# Altium PCB ESP8266_Impedance.PcbDoc
Units mil, origin at the board's own origin, x right, y up, seen from the top; angles counter-clockwise.
Board outline 1725 x 1350 mil, 2 copper layers (Top Layer, Bottom Layer); 21 components, 0 nets, 105 pads, 13 vias.
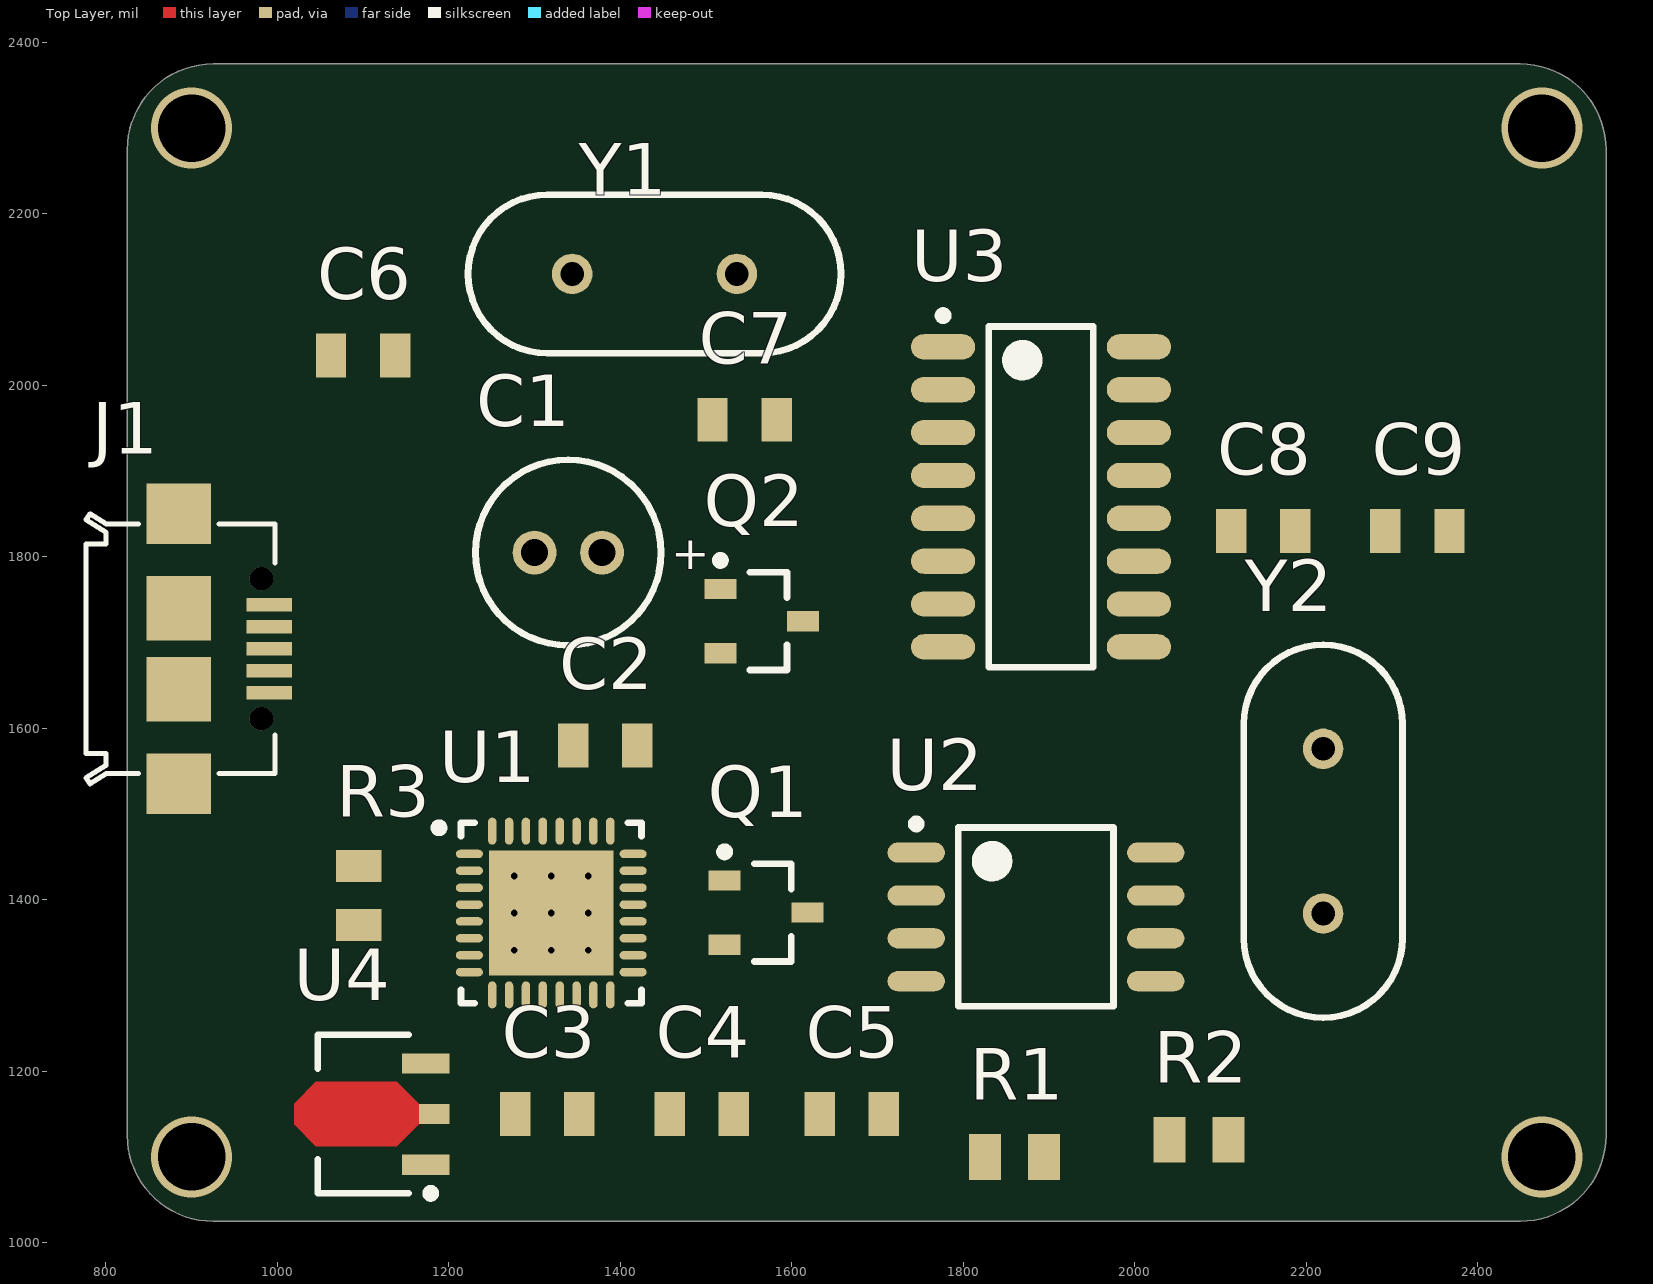
[diagram p0: Top Layer view]
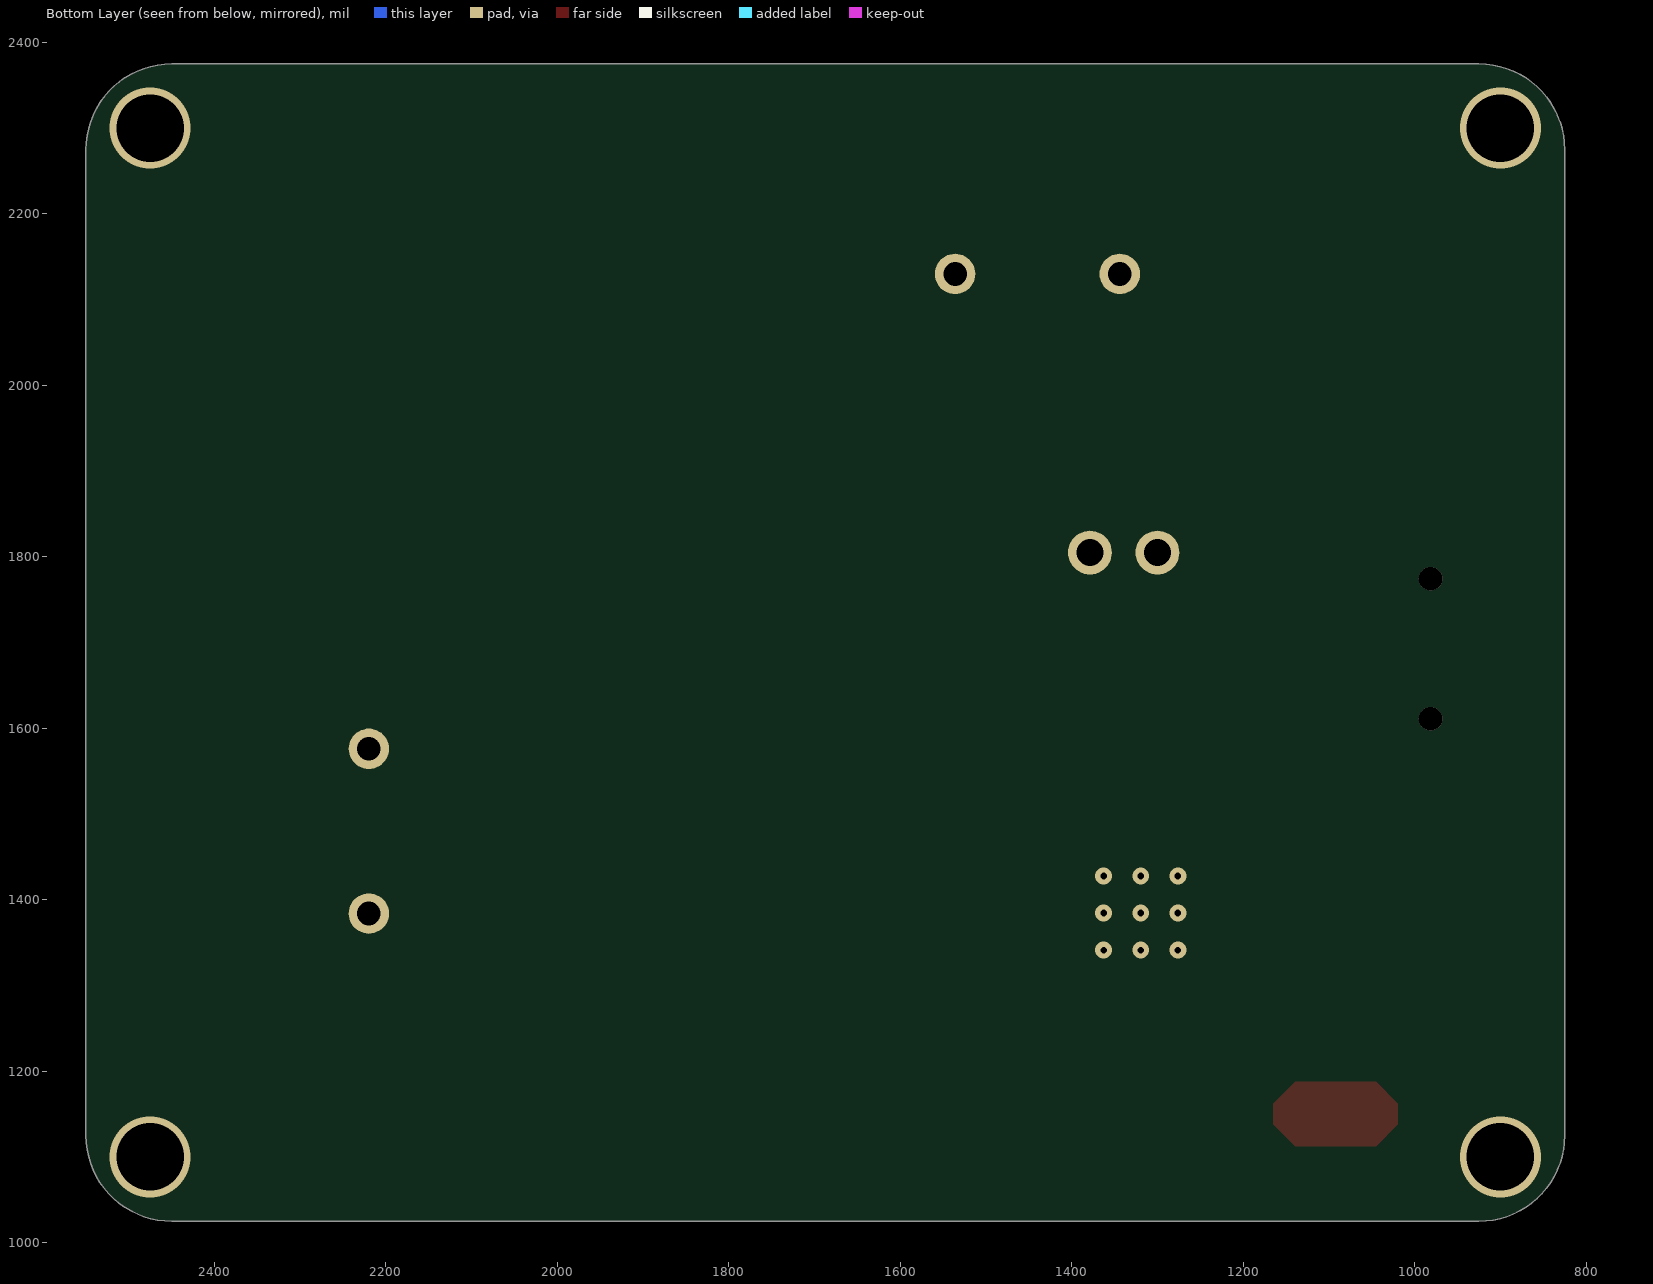
[diagram p1: Bottom Layer view, seen from below]

## Layer stack, top to bottom
Top Solder: solder mask 0.4, Solder Resist, Dk 3.5
Top Layer: signal copper 1.4
Dielectric 1: dielectric 12.6, FR-4, Dk 4.8
Bottom Layer: signal copper 1.4
Bottom Solder: solder mask 0.4, Solder Resist, Dk 3.5

## Board outline
825,1125 ccw(c925,1125) 925,1025 2450,1025 ccw(c2450,1125) 2550,1125 2550,2275 ccw(c2450,2275) 2450,2375 925,2375 ccw(c925,2275) 825,2275

## Design rules (kind name [scope] priority, off if disabled: settings)
Clearance [All] p1: gap=10 ignorepadtopadclearanceinfootprint=FALSE except(0: Arc-Hole Track-Hole SMDPad-Hole THPad-Hole Via-Hole Fill-Hole Poly-Hole Region-Hole Text-Hole)
PolygonConnect [All] p1: connectstyle=Relief reliefconductorwidth=10 reliefentries=4 polygonreliefangle="90 Angle" airgapwidth=10
RoutingVias [All] p1: holewidth=28 width=50 viastyle="Through Hole" minholewidth=28 minwidth=50 maxholewidth=28 maxwidth=50
SolderMaskExpansion [All] p1: expansion=4 istentingtop=FALSE
Width [All] p1: maxlimit=10 minlimit=10 preferedwidth=10
30 further rules are at their usual default settings.

## Components (designator, comment, footprint, x,y, rotation, side; value= is the part's Value field where it differs from the comment)
C1 "100µF" WCAP-ATG8_5x11 1339.37,1805 r0 top
C2 "10µF" WCAP-CSGP_0805_H=0.8mm_Reflow 1382.4,1580 r0 top
C3 "1µF" WCAP-CSGP_0805_H=0.8mm_Reflow 1315,1150 r0 top
C4 "100nF" WCAP-CSGP_0805_H=0.8mm_Reflow 1495,1150 r0 top
C5 "10nF" WCAP-CSGP_0805_H=0.8mm_Reflow 1670,1150 r0 top
C6 "22pF" WCAP-CSGP_0805_H=0.8mm_Reflow 1100,2035 r0 top
C7 "22pF" WCAP-CSGP_0805_H=0.8mm_Reflow 1545,1960 r0 top
C8 "22pF" WCAP-CSGP_0805_H=0.8mm_Reflow 2150,1830 r0 top
C9 "22pF" WCAP-CSGP_0805_H=0.8mm_Reflow 2330,1830 r0 top
J1 "Micro USB 2.0 Type B Receptacle" 629105136821 885,1692.76 r270 top
Q1 "NPN" SOT23P250X110-3N 1570,1385 r0 top
Q2 "NPN" SOT23P250X110-3N 1565,1725 r0 top
R1 "10k" WRIS-PSMB_0805_H=0.22mm 1860,1100 r0 top
R2 "10k" WRIS-PSMB_0805_H=0.22mm 2075,1120 r0 top
R3 "12k" WRIS-PSMB_0805_H=0.22mm 1095,1405 r90 top
U1 "ESP8266EX" ESP8266EX 1319.53,1384.53 r0 top
U2 "GD25Q32BxIGx" GD25Q32BxIGx 1885,1380 r0 top
U3 "CH340G" CH340G 1890.83,1870 r0 top
U4 "HT7833" HT7833 1110,1150 r180 top
Y1 "24MHz" WE-XTAL_HC49/4H 1440,2130 r0 top
Y2 "12MHz" WE-XTAL_HC49/4H 2220,1480 r90 top

## Footprints (in the part's own frame and the unit in brackets; to place one, negate y for a bottom-side part, rotate by r counter-clockwise, add the part's x,y. Pads: shape width x height; smd on the part's side, far side on the other; paste and mask are expansions set on the pad)
629105136821 [mm] "Micro USB 2.0 SMT Type B Horizontal 5 Contacts"
  rect 0.4x1.35 smd: 1(-1.3,2.675) 2(-0.65,2.675) 3(0,2.675) 4(0.65,2.675) 5(1.3,2.675)
  round 0.7 hole 0.7 unplated: MH1(-2.075,2.45) MH2(2.075,2.45)
  rect 1.8x1.9 smd: S1(-4,0) S4(4,0)
  rect 1.9x1.9 smd: S2(-1.2,0) S3(1.2,0)
  silkscreen extent -4,-2.75 4,2.85, body extent -4,-2.73 4,3.17, height 2.69
CH340G [mm] "TSOP, 16-Leads, Body 10,06x3,90mm, Pitch 1,27mm, IPC Medium Density"
  oval 1.9x0.75 smd: 1(-2.9,4.445) 2(-2.9,3.175) 3(-2.9,1.905) 4(-2.9,0.635) 5(-2.9,-0.635) 6(-2.9,-1.905) 7(-2.9,-3.175) 8(-2.9,-4.445) 9(2.9,-4.445) 10(2.9,-3.175) 11(2.9,-1.905) 12(2.9,-0.635) 13(2.9,0.635) 14(2.9,1.905) 15(2.9,3.175) 16(2.9,4.445)
  silkscreen extent -3.02,-5.05 1.55,5.49, body extent -3.41,-5.05 3.41,5.05, height 1.6
ESP8266EX [mm] "QFN, 32-Leads, Body 5.00x5.00mm, Pitch 0.50mm, Thermal Pad 3.70x3.70mm, IPC Medium Density"
  oval 0.8x0.25 smd: 1(-2.425,1.75) 2(-2.425,1.25) 3(-2.425,0.75) 4(-2.425,0.25) 5(-2.425,-0.25) 6(-2.425,-0.75) 7(-2.425,-1.25) 8(-2.425,-1.75) 17(2.425,-1.75) 18(2.425,-1.25) 19(2.425,-0.75) 20(2.425,-0.25) 21(2.425,0.25) 22(2.425,0.75) 23(2.425,1.25) 24(2.425,1.75)
  oval 0.25x0.8 smd: 9(-1.75,-2.425) 10(-1.25,-2.425) 11(-0.75,-2.425) 12(-0.25,-2.425) 13(0.25,-2.425) 14(0.75,-2.425) 15(1.25,-2.425) 16(1.75,-2.425) 25(1.75,2.425) 26(1.25,2.425) 27(0.75,2.425) 28(0.25,2.425) 29(-0.25,2.425) 30(-0.75,2.425) 31(-1.25,2.425) 32(-1.75,2.425)
  rect 3.7x3.7 smd: 33(0,0)
  silkscreen extent -3.45,-2.68 2.68,2.67, body extent -2.61,-2.61 2.61,2.61, height 0.85
GD25Q32BxIGx [mm] "SOP, 8-Leads, Body 5.23x5.28mm, Pitch 1.27mm, IPC Medium Density"
  oval 1.7x0.6 smd: 1(-3.55,1.905) 2(-3.55,0.635) 3(-3.55,-0.635) 4(-3.55,-1.905) 5(3.55,-1.905) 6(3.55,-0.635) 7(3.55,0.635) 8(3.55,1.905)
  silkscreen extent -3.67,-2.65 2.3,2.88, body extent -3.95,-2.65 3.95,2.65, height 2.16
HT7833 [mm] "SOT89, 3-Leads"
  rect 1.4x0.6 smd: 1(-1.6,1.5) 3(-1.6,-1.5)
  rect 0.9x0.6 smd: 2(-1.85,0)
  Top Layer region: -1.4,0.3 -0.75,0.95 1.65,0.95 2.3,0.3 2.3,-0.3 1.65,-0.95 -0.75,-0.95 -1.4,-0.3
  silkscreen extent -1.88,-2.35 1.6,2.47, body extent -2.25,-2.35 2.15,2.35, height 1.6
SOT23P250X110-3N [mm] "SOT23, 3-Leads, Body 2.90x2.50mm, Pitch 0.95mm, IPC Medium Density"
  rect 0.95x0.6 smd: 1(-1.225,0.95) 2(-1.225,-0.95) 3(1.225,0)
  silkscreen extent -1.35,-1.45 0.75,1.92, body extent -1.35,-1.45 1.35,1.45, height 1.1
WCAP-ATG8_5x11 [mm] "Aluminum Electrolytic Capacitors, 5x11mm"
  round 1.3 hole 0.8: 1(-1,0) 2(1,0)
  silkscreen extent -2.75,-2.75 2.75,2.75, body extent -2.49,-2.5 2.5,2.5, height 11.31
WCAP-CSGP_0805_H=0.8mm_Reflow [mm] "Ceramic Capacitors, body 2x1.25mm"
  rect 0.9x1.3 smd: 1(-0.95,0) 2(0.95,0)
  body extent -1,-0.62 1,0.63, height 0.8
WE-XTAL_HC49/4H [mm] "Quartz Crystal, size HC49/4H, body 11.05x4.7mm"
  round 1.2 hole 0.7: 1(-2.44,0) 2(2.44,0)
  silkscreen extent -5.53,-2.35 5.53,2.35, body extent -5.52,-2.35 5.53,2.35, height 4.15
WRIS-PSMB_0805_H=0.22mm [mm] "Metal Plate Resistor, SMT, body size 2x1.25mm"
  rect 0.95x1.36 smd: 1(-0.875,0) 2(0.875,0)
  body extent -1,-0.62 1,0.63, height 0.22

## Part data
C1: library part 860010272005, "WCAP-ATG8 THT Aluminum Electrolytic Capacitors, D5mm x L11mm, 100uF, +/-20%, 10VDC", Capacitance=100uF, Capacitance Tolerance=+/-20%, Leakage Current=10uA, Operating Temperature="-40 to +85degC", Rated Voltage=10VDC, Ripple Current max.=198mA, ComponentLink1Description=Manufacturer, ComponentLink1URL=http://www.we-online.de, ComponentLink2Description=Datasheet, ComponentLink2URL=https://katalog.we-online.com/pbs/datasheet/860010272005.pdf, Diameter=5mm, Dissipation Factor=19%, Endurance=2000h, Length=11mm, Mounting Technology=THT, Packaging="Ammo Pack", Part Number=860010272005, Published Date="August 2019", Publisher="Wurth Elektronik", Technical Reference=ATBC110101M010DSPA3B000
C2 C3 C4 C5 C6 C7 C8 C9: library part 885012007007, "WCAP-CSGP General Purpose Ceramic Capacitors, size 0805, 470pF, +/-5%, 10VDC", Capacitance=470pF, Capacitance Tolerance=+/-5%, Isolation Resistance=>=10GOhm, Operating Temperature="-55 to +125degC", Rated Voltage=10VDC, Ceramic Type=NP0, ComponentLink1Description=Manufacturer, ComponentLink1URL=http://www.we-online.de, ComponentLink2Description=Datasheet, ComponentLink2URL=https://katalog.we-online.com/pbs/datasheet/885012007007.pdf, Dissipation Factor=Q>=1000, Height="0.8mm +/-0.10mm", Mounting Technology=SMD, Packaging="Tape and Reel", Part Number=885012007007, Published Date="August 2019", Publisher="Wurth Elektronik", Size=0805, Technical Reference=NP00805471J010DFCT10000
J1: library part 629105136821, "Micro USB 2.0 Type B, Receptacle, Horizontal, SMT", Operating Temperature="-40 to +105degC", Rated Current=1A, Working Voltage=30VAC, Application="Micro USB 2.0", ComponentLink1Description=Manufacturer, ComponentLink1URL=http://www.we-online.de, ComponentLink2Description=Datasheet, ComponentLink2URL=https://katalog.we-online.com/em/datasheet/629105136821.pdf, Gender=Receptacle, Interface Type="Type B", Mounting Technology=SMT, Packaging="Tape and Reel", Part Number=629105136821, Pin Number=5, Published Date="September 2019", Publisher="Wurth Elektronik", Type=Horizontal
Q1 Q2: "NPN Bipolar Transistor", Code_JEDEC=TO-226-AA, LatestRevisionDate=17-Jul-2002, LatestRevisionNote="Re-released for DXP Platform.", PackageDescription="TO, Flat Index; 3 In-Line, Axial Leads; Body Dia. 4.8mm; Leads 0.55 x 0.51 mm (max)", PackageReference=TO-226-AA, Published=8-Jun-2000, Publisher="Altium Limited"
R1 R2 R3: library part 580060720008, "WRIS-PSMB Metal Plate Resistors, size 0805, 10mOhm, +/-1%, 0.5W", Operating Temperature="-55 to +155degC", Rated Current=7.07A, Rated Power=0.5W, Resistance=10mOhm, Resistance Tolerance=+/-1%, Temperature Coefficient of Resistance=+/-100ppm/degC, ComponentLink1Description=Manufacturer, ComponentLink1URL=http://www.we-online.de, ComponentLink2Description=Datasheet, ComponentLink2URL=https://katalog.we-online.com/pbs/datasheet/580060720008.pdf, Height=0.22mm, Length=2mm, Mounting Technology=SMT, Packaging="Tape and Reel", Part Number=580060720008, Published Date="September 2019", Publisher="Wurth Elektronik", Size=0805, Technical Reference=MB0805R010F102KAATP0000, Width=1.25mm
Y1 Y2: library part 830003224B, "HC-49 24MHz", Frequency=14.7456MHz, Frequency Stability=50ppm, Frequency Tolerance=+/-30ppm, Load Capacitance=30pF, Operating Temperature="-10 up to +60degC", ComponentLink1Description=Manufacturer, ComponentLink1URL=http://www.we-online.de, ComponentLink2Description=Datasheet, ComponentLink2URL=https://katalog.we-online.com/pbs/datasheet/830003224B.pdf, Mounting Technology=THT, Packaging=Bulk, Part Number=830003224B, Published Date="March 2019", Publisher="Wurth Elektronik", Size=HC49-4H

## Via types
v1: diameter 19.68, hole 7.87, Top Layer to Bottom Layer, 9 vias
v2: diameter 94.49, hole 78.74, Top Layer to Bottom Layer, 4 vias

## Nets (pads, with @x,y where several pads share a name; then routed paths per layer and width w, separated by ;. In a path a pad name is that pad's centre, name@x,y a point inside that pad or via, vN(x,y) a via of type N, cw(c..) or ccw(c..) an arc to the next point about the centre after c; other vN are vias at no path point)
pads on no net: C1.1 C1.2 C2.1 C2.2 C3.1 C3.2 C4.1 C4.2 C5.1 C5.2 C6.1 C6.2 C7.1 C7.2 C8.1 C8.2 C9.1 C9.2 J1.1 J1.2 J1.3 J1.4 J1.5 J1.MH1 J1.MH2 J1.S1 J1.S2 J1.S3 J1.S4 Q1.1 Q1.2 Q1.3 Q2.1 Q2.2 Q2.3 R1.1 R1.2 R2.1 R2.2 R3.1 R3.2 U1.1 U1.2 U1.3 U1.4 U1.5 U1.6 U1.7 U1.8 U1.9 U1.10 U1.11 U1.12 U1.13 U1.14 U1.15 U1.16 U1.17 U1.18 U1.19 U1.20 U1.21 U1.22 U1.23 U1.24 U1.25 U1.26 U1.27 U1.28 U1.29 U1.30 U1.31 U1.32 U1.33 U2.1 U2.2 U2.3 U2.4 U2.5 U2.6 U2.7 U2.8 U3.1 U3.2 U3.3 U3.4 U3.5 U3.6 U3.7 U3.8 U3.9 U3.10 U3.11 U3.12 U3.13 U3.14 U3.15 U3.16 U4.1 U4.2 U4.3 Y1.1 Y1.2 Y2.1 Y2.2
copper on no net:
  other v1: 1276.22,1341.22 1319.53,1341.22 1362.83,1341.22 1276.22,1384.53 1319.53,1384.53 1362.83,1384.53 1276.22,1427.83 1319.53,1427.83 1362.83,1427.83
  other v2: 900,1100 2475,1100 900,2300 2475,2300

## Text inside footprints (layer, text, board x,y; h text height)
C1: Top Overlay "+" at 1459.45,1785.32 h39.37
J1: Mechanical 2 "PCB Edge" at 802.32,1740 h16 r270